# Altium PCB MOTORDEMO.PcbDoc
Units mm, origin at the board's own origin, x right, y up, seen from the top; angles counter-clockwise.
Board outline 56.64 x 37.09 mm, 2 copper layers (Top Layer, Bottom Layer); 56 components, 55 nets, 192 pads, 49 vias.
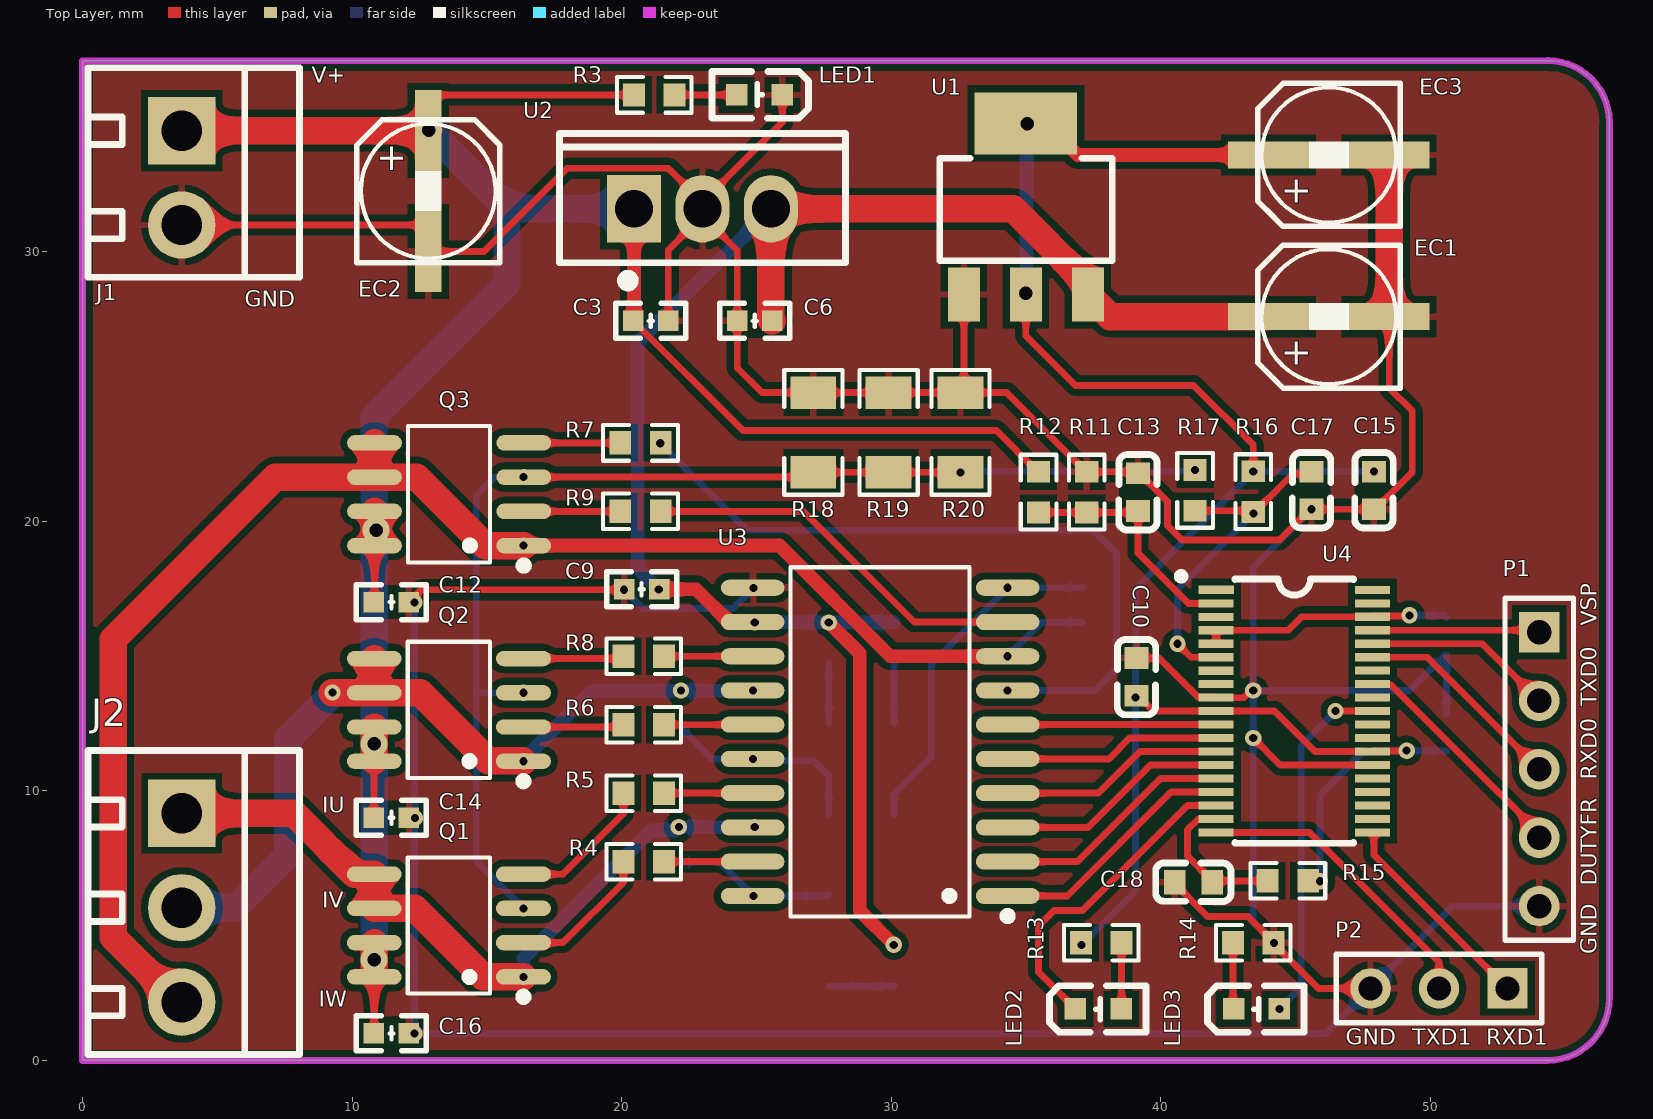
[diagram p0: Top Layer view]
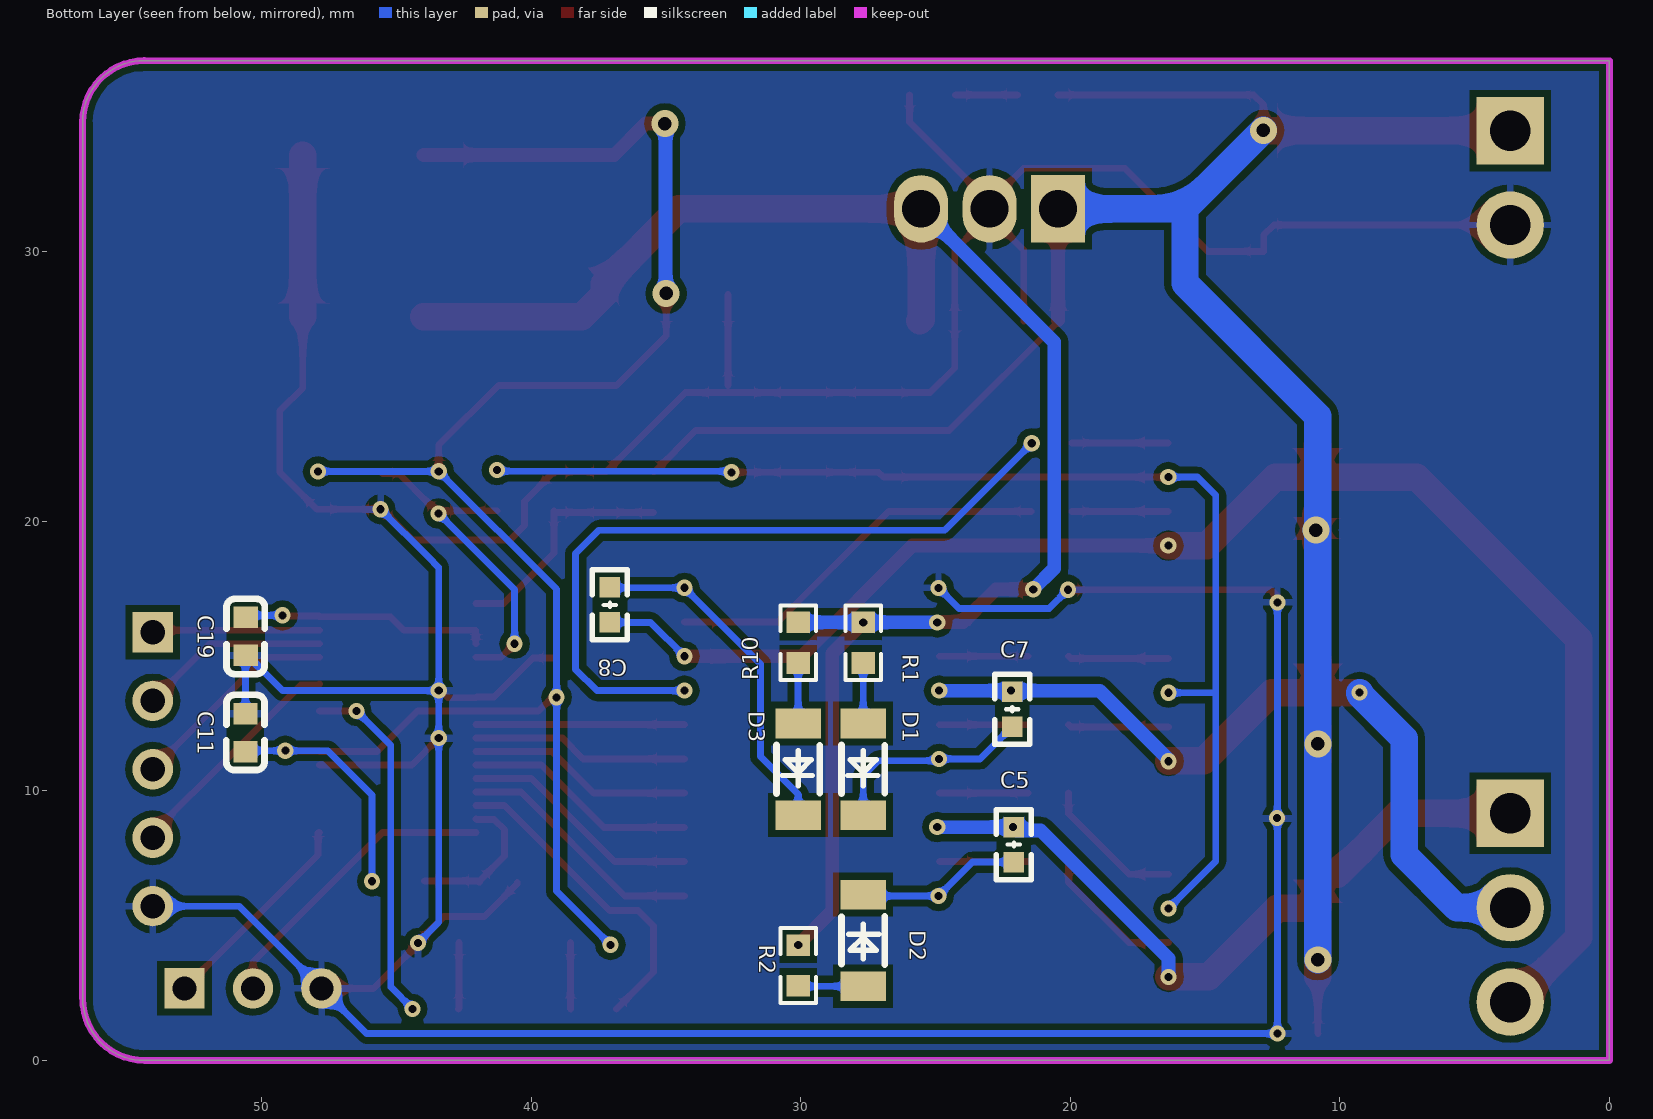
[diagram p1: Bottom Layer view, seen from below]

## Layer stack, top to bottom
Top Solder: solder mask 0.0102, Solder Resist, Dk 3.5
Top Layer: signal copper 0.0356
Dielectric 1: dielectric 0.32, FR-4, Dk 4.8
Bottom Layer: signal copper 0.0356
Bottom Solder: solder mask 0.0102, Solder Resist, Dk 3.5

## Board outline
0.004,-0.004 54.352,-0.004 ccw(c54.352,2.286) 56.642,2.286 56.646,2.29 56.646,34.798 ccw(c54.356,34.798) 54.356,37.088 54.349,37.08 0.004,37.08

## Design rules (kind name [scope] priority, off if disabled: settings)
Clearance [All] p1: gap=0.127 ignorepadtopadclearanceinfootprint=TRUE except(0.254: Arc-Fill Arc-Poly Arc-Region Track-Fill Track-Poly Track-Region SMDPad-Fill SMDPad-Poly SMDPad-Region THPad-Fill THPad-Poly THPad-Region Via-Fill Via-Poly Via-Region Fill-Fill Fill-Poly Fill-Region Poly-Poly Poly-Region Region-Region)
DiffPairsRouting [All] p1: maxlimit=0.254 minlimit=0.089 mostfreqgap=0.254 toplayer_minwidth=0.381 toplayer_maxwidth=0.381 toplayer_prefwidth=0.381 bottomlayer_minwidth=0.381 bottomlayer_maxwidth=0.381 bottomlayer_prefwidth=0.381 maxuncoupledlength=12.7
PolygonConnect [All] p1: connectstyle=Relief reliefconductorwidth=0.254 reliefentries=4 polygonreliefangle="90 Angle" airgapwidth=0.254
RoutingVias [All] p1: holewidth=0.711 width=1.27 viastyle="Through Hole" minholewidth=0.3 minwidth=0.5 maxholewidth=6.3 maxwidth=1.27
SilkToSilkClearance [All] p1: silktosilkclearance=0
SilkToSolderMaskClearance [IsPad] p1: minsilkscreentomaskgap=0 clearancetoexposedcopper=TRUE
SolderMaskExpansion [All] p1: expansion=0.102 istentingtop=FALSE
Width [All] p1: maxlimit=2.54 minlimit=0.089 preferedwidth=0.254
27 further rules are at their usual default settings.

## Components (designator, comment, footprint, x,y, rotation, side; value= is the part's Value field where it differs from the comment)
C3 "330nF" "C 0603_L" 21.082,27.432 r0 top
C5 "0.1uF" "C 0603_L" 22.098,8.001 r270 bottom
C6 "100nF" "C 0603_L" 24.94,27.432 r180 top
C7 "0.1uF" "C 0603_L" 22.158,13.024 r270 bottom
C8 "0.1uF" "C 0603_L" 37.084,16.897 r270 bottom
C9 "1uF" "C 0603_L" 20.743,17.474 r0 top
C10 "1uF" C0603 39.105,14.224 r90 top
C11 "1uF" C0603 50.606,12.154 r270 bottom
C12 "330nF" "C 0603_L" 11.46,17 r180 top
C13 "10nF" C0603 39.158,21.079 r90 top
C14 "330nF" "C 0603_L" 11.46,9 r180 top
C15 "1uF" C0603 47.908,21.142 r270 top
C16 "330nF" "C 0603_L" 11.46,1 r180 top
C17 "220pF" C0603 45.592,21.142 r270 top
C18 "10nF" C0603 41.22,6.604 r0 top
C19 "10nF" C0603 50.596,15.73 r90 bottom
D1 "SS16-LTP" LL-34_L3.5-W1.5-RD 27.686,10.795 r90 bottom
D2 "SS16-LTP" LL-34_L3.5-W1.5-RD 27.686,4.445 r270 bottom
D3 "SS16-LTP" LL-34_L3.5-W1.5-RD 30.099,10.795 r90 bottom
EC1 "10uF" SMD-EC5.0X5.3X5.4 44,27.587 r0 top
EC2 "10uF" SMD-EC5.0X5.3X5.4 12.827,34.488 r270 top
EC3 "10uF" SMD-EC5.0X5.3X5.4 44,33.587 r0 top
J1 "KF350-2P" KF350-2P 3.683,34.488 r270 top
J2 "KF350-3P" KF350-3P 3.683,9.159 r270 top
LED1 "LED" LED0603-R-RD 25.115,35.814 r180 top
LED2 "LED" LED0603-R-RD 37.688,1.905 r0 top
LED3 "LED" LED0603-R-RD 43.552,1.905 r0 top
P1 "Header 5" HDR1X5 54.044,15.877 r270 top
P2 "Header 3" HDR1X3 52.865,2.667 r180 top
Q1 "NCE6005AS_C558201" NCE6005AS 13.589,5 r90 top
Q2 "NCE6005AS_C558201" NCE6005AS 13.589,13 r90 top
Q3 "NCE6005AS_C558201" NCE6005AS 13.6,21 r90 top
R1 "5.1" R0603 27.686,15.494 r90 bottom
R2 "5.1" R0603 30.099,3.517 r90 bottom
R3 "20K" R0603 21.209,35.814 r0 top
R4 "22" R0603 20.819,7.37 r0 top
R5 "22" R0603 20.819,9.91 r0 top
R6 "22" R0603 20.819,12.45 r0 top
R7 "22" R0603 20.701,22.905 r180 top
R8 "22" R0603 20.819,14.99 r0 top
R9 "22" R0603 20.701,20.365 r180 top
R10 "5.1" R0603 30.099,15.494 r270 bottom
R11 "30K" R0603 37.253,21.079 r270 top
R12 "100K" R0603 35.466,21.079 r90 top
R13 "22K" R0603 37.794,4.365 r180 top
R14 "22K" R0603 43.434,4.365 r180 top
R15 "2K" R0603 44.719,6.657 r180 top
R16 "10K" R0603 43.434,21.097 r270 top
R17 "2K" R0603 41.275,21.142 r90 top
R18 "1" R1206 27.112,23.292 r270 top
R19 "1" R1206 29.906,23.292 r270 top
R20 "1" R1206 32.573,23.292 r270 top
U1 "AMS1117-3.3_C498117" PG-SOT223-4_L6.5-W3.5-P2.30-LS7.0-BR 35,31.587 r270 top
U2 "7812" TO-220-3_L10.0-W4.5-P2.54-L 23,31.587 r0 top
U3 "FAN7888MX" FAN7888 29.591,11.815 r90 top locked
U4 "IMC101T-T038" IMC101T-T038 44.958,12.954 r270 top

## Footprints (in the part's own frame and the unit in brackets; to place one, negate y for a bottom-side part, rotate by r counter-clockwise, add the part's x,y. Pads: shape width x height; smd on the part's side, far side on the other; paste and mask are expansions set on the pad)
C0603 [mm] "C15725"
  rect 0.8x0.9 smd: 1(-0.7,0) 2(0.7,0)
  silkscreen extent -1.41,-0.71 1.39,0.72
"C 0603_L" [mil] "无极性贴片电容"
  rect 30x30 smd: 1(-25.59,0) 2(25.59,0)
  silkscreen extent -51,-26 51,26, body extent -31,-16 31,16, height 32
FAN7888 [mm] "SOIC-20_L13.0-W7.6-P1.27-LS10.3-BL"
  oval 0.595x2.36 smd: 1(-5.715,-4.73) 2(-4.445,-4.73) 3(-3.175,-4.73) 4(-1.905,-4.73) 5(-0.635,-4.73) 6(0.635,-4.73) 7(1.905,-4.73) 8(3.175,-4.73) 9(4.445,-4.73) 10(5.715,-4.73) 11(5.715,4.73) 12(4.445,4.73) 13(3.175,4.73) 14(1.905,4.73) 15(0.635,4.73) 16(-0.635,4.73) 17(-1.905,4.73) 18(-3.175,4.73) 19(-4.445,4.73) 20(-5.715,4.73)
  silkscreen extent -6.61,-4.88 6.48,3.32
HDR1X3 [mm] "Connector; Header; 3 Position"
  rect 1.5x1.5 hole 0.9: 1(0,0)
  round 1.5 hole 0.9: 2(2.54,0) 3(5.08,0)
  silkscreen extent -1.27,-1.27 6.35,1.27
HDR1X5 [mm] "Connector; Header; 5 Position"
  rect 1.5x1.5 hole 0.9: 1(0,0)
  round 1.5 hole 0.9: 2(2.54,0) 3(5.08,0) 4(7.62,0) 5(10.16,0)
  silkscreen extent -1.27,-1.27 11.43,1.27
IMC101T-T038 [mm] "TSSOP-38_L9.7-W4.4-P0.50-LS6.4-BL"
  rect 0.3x1.3 smd: 1(-4.501,-2.899) 2(-3.999,-2.901) 3(-3.498,-2.901) 4(-2.999,-2.901) 5(-2.499,-2.901) 6(-1.999,-2.901) 7(-1.499,-2.901) 8(-0.999,-2.901) 9(-0.499,-2.901) 10(0.001,-2.901) 11(0.501,-2.901) 12(1.001,-2.901) 13(1.501,-2.901) 14(2.001,-2.901) 15(2.501,-2.901) 16(3.001,-2.901) 17(3.501,-2.901) 18(4.001,-2.901) 19(4.501,-2.901) 20(4.5,2.899) 21(4.001,2.9) 22(3.501,2.899) 23(3.002,2.899) 24(2.499,2.901) 25(2,2.9) 26(1.5,2.9) 27(1,2.9) 28(0.5,2.9) 29(0,2.9) 30(-0.5,2.9) 31(-1,2.9) 32(-1.5,2.9) 33(-2,2.9) 34(-2.5,2.9) 35(-3,2.9) 36(-3.5,2.9) 37(-4,2.9) 38(-4.5,2.9)
  silkscreen extent -5.14,-4.34 4.9,2.2
KF350-2P [mm] "可拼接端子/10A"
  rect 2.5x2.5 hole 1.5: 1(0,0)
  round 2.5 hole 1.5: 2(3.5,0)
  silkscreen extent -2.34,-3.48 5.44,4.37, body extent -2.15,-3.34 5.25,4.16, height 10
KF350-3P [mm] "可拼接端子/10A"
  rect 2.5x2.5 hole 1.5: 1(0,0)
  round 2.5 hole 1.5: 2(3.5,0) 3(7,0)
  silkscreen extent -2.34,-3.48 8.94,4.37, body extent -2.15,-3.34 8.75,4.16, height 10
LED0603-R-RD [mm] "C181863"
  rect 0.8x0.8 smd: 1(0.851,0) 2(-0.851,0)
  silkscreen extent -1.82,-0.86 1.77,0.86
LL-34_L3.5-W1.5-RD [mm] "二极管玻璃"
  rect 1.1x1.7 smd: 1(-1.7,0) 2(1.7,0)
  silkscreen extent -0.9,-0.8 0.9,0.8
NCE6005AS [mm] "SOP-8_L5.0-W4.0-P1.27-LS6.0-BL"
  oval 0.574x2.036 smd: 1(-1.905,-2.768) 2(-0.635,-2.768) 3(0.635,-2.768) 4(1.905,-2.768) 5(1.905,2.768) 6(0.635,2.768) 7(-0.635,2.768) 8(-1.905,2.768)
  silkscreen extent -2.79,-2.92 2.53,1.52
PG-SOT223-4_L6.5-W3.5-P2.30-LS7.0-BR [mm]
  rect 2x1.2 smd: 1(3.175,-2.3) 2(3.175,0) 3(3.175,2.3)
  rect 2.3x3.8 smd: 4(-3.175,0)
  silkscreen extent -1.87,-3.2 1.93,3.2
R0603 [mm] "C327832"
  rect 0.806x0.864 smd: 1(-0.753,0) 2(0.753,0)
  silkscreen extent -1.39,-0.66 1.39,0.66
R1206 [mm]
  rect 1.208x1.701 smd: 1(-1.479,0) 2(1.479,0)
  silkscreen extent -2.31,-1.08 2.31,1.08
SMD-EC5.0X5.3X5.4 [mm]
  rect 3x1 smd: 1(0,0) 2(4.477,0)
  silkscreen extent -0.41,-2.65 4.89,2.66, body extent -0.79,-2.65 5.11,2.65, height 5.41
TO-220-3_L10.0-W4.5-P2.54-L [mm]
  rect 2x2.5 hole 1.4: 1(-2.54,0)
  oval 2x2.5 hole 1.4: 2(0,0) 3(2.54,0)
  silkscreen extent -5.3,-2.86 5.3,2.8

## Part data
C3 C5 C6 C7 C8 C9 C12 C14 C16: library part CAP, "Capacitor"
C10 C11 C13 C15 C17 C18 C19: library part 100nF, BOM_JLCPCB Part Class="Extended Part", BOM_Manufacturer=SAMSUNG, BOM_Manufacturer Part=CL10B104KC8NNNC, BOM_Supplier=LCSC, BOM_Supplier Part=C15725, nameAlias=Capacitance, spicePre=C, spiceSymbolName=CL10B104KC8NNNC
D1 D2 D3: BOM_JLCPCB Part Class="Extended Part", BOM_Manufacturer=MCC, BOM_Manufacturer Part=SS16-LTP, BOM_Supplier=LCSC, BOM_Supplier Part=C85689, spicePre=D, spiceSymbolName=SS16-LTP
EC1 EC2 EC3: library part SMD_ECAP, "贴片电解电容"
LED1 LED2 LED3: BOM_JLCPCB Part Class="Extended Part", BOM_Manufacturer="Everlight Elec", BOM_Manufacturer Part=19-213/R6W-BP2Q2B/3T, BOM_Supplier=LCSC, BOM_Supplier Part=C181863, Contributor=LCSC, spicePre=L, spiceSymbolName=19-213/R6W-BP2Q2B/3T
P1: "Header, 5-Pin", LatestRevisionDate=17-Jul-2002, LatestRevisionNote="Re-released for DXP Platform.", Publisher="Altium Limited"
P2: "Header, 3-Pin", LatestRevisionDate=17-Jul-2002, LatestRevisionNote="Re-released for DXP Platform.", Publisher="Altium Limited"
Q1 Q2 Q3: BOM_JLCPCB Part Class="Extended Part", BOM_Manufacturer="VBsemi Elec", BOM_Manufacturer Part=NCE6005AS, BOM_Supplier=LCSC, BOM_Supplier Part=C558201, Contributor=LCSC, spicePre=Q, spiceSymbolName=NCE6005AS_C558201
R1 R2 R3 R4 R5 R6 R7 R8 R9 R10 R11 R12 R13 R14 R15 R16 R17 R18 R19 R20: library part 1M, BOM_Manufacturer="Huaxin S&T", BOM_Manufacturer Part=MR06X105JTL, BOM_Supplier=LCSC, BOM_Supplier Part=C327832, Contributor=LCSC, nameAlias="Resistance (Ohms)", spicePre=R, spiceSymbolName=MR06X105JTL
U1: BOM_Manufacturer="HGC(Huaguan Semicon)", BOM_Manufacturer Part=AMS1117-3.3, BOM_Supplier=LCSC, BOM_Supplier Part=C498117, Contributor=LCSC, spicePre=U, spiceSymbolName=AMS1117-3.3_C498117
U2: BOM_JLCPCB Part Class="Extended Part", BOM_Manufacturer="Foshan Blue Rocket Elec", BOM_Manufacturer Part=7812, BOM_Supplier=LCSC, BOM_Supplier Part=C358369, Contributor=LCSC, spicePre=U, spiceSymbolName=7812
U3: BOM_JLCPCB Part Class="Extended Part", BOM_Manufacturer="ON Semicon", BOM_Manufacturer Part=FAN7888MX, BOM_Supplier=LCSC, BOM_Supplier Part=C258167, Contributor=LCSC, spicePre=U, spiceSymbolName=FAN7888MX
U4: BOM_JLCPCB Part Class="Extended Part", BOM_Manufacturer="Infineon Technologies", BOM_Manufacturer Part=IMC101T-T038, BOM_Supplier=LCSC, BOM_Supplier Part=C536267, Contributor=LCSC, spicePre=U, spiceSymbolName=IMC101T-T038

## Via types
v1: diameter 0.6, hole 0.3, Top Layer to Bottom Layer, tented both sides, 40 vias
v2: diameter 1, hole 0.5, Top Layer to Bottom Layer, tented both sides, 6 vias
v3: diameter 0.6, hole 0.3, Top Layer to Bottom Layer, 3 vias

## Nets (pads, with @x,y where several pads share a name; then routed paths per layer and width w, separated by ;. In a path a pad name is that pad's centre, name@x,y a point inside that pad or via, vN(x,y) a via of type N, cw(c..) or ccw(c..) an arc to the next point about the centre after c; other vN are vias at no path point)
+3.3V: C10.1 C11.2 C15.1 EC3.1 R13.2 R15.1 R16.1 U1.2 U1.4 U4.10 U4.26 | length 72.7
  Top Layer w0.254: v2(34.995,28.454) 34.995,28.417 U1.2 34.995,28.407 34.995,26.877 36.837,25.035 41.22,25.035 43.434,22.82 v1(43.434,21.85) ; R13.2 37.067,4.338 v1(37.067,4.284) ; C10.1 39.155,13.524 39.726,12.953 U4.10 44.219,12.953 45.718,11.454 U4.26 47.874,11.47 49.109,11.47 v1(49.125,11.486)
  Top Layer w0.508: v2(35.042,34.752) 35.76,34.752 36.925,33.587 EC3.1
  Bottom Layer w0.254: v1(37.067,4.284) 39.06,6.277 v1(39.06,13.467) 39.06,17.476 v1(43.434,21.85) 43.438,21.846 47.904,21.846 v1(47.908,21.842) ; v1(45.914,6.641) 45.914,9.846 47.554,11.486 v1(49.125,11.486) 50.575,11.486 C11.2
  Bottom Layer w0.508: v2(34.995,28.454) 35.018,28.477 35.018,34.728 v2(35.042,34.752)
+12V: C6.1 C9.2 EC1.1 R1.2 R2.2 R10.1 U1.3 U2.3 U3.12 | length 63.1
  Top Layer w0.508: C9.2 22.765,17.474 23.979,16.26 U3.12 ; v1(27.686,16.247) 28.829,15.104 28.829,5.553 v1(30.097,4.284)
  Top Layer w1.016: C6.1 25.54,27.482 U2.3 34.525,31.587 37.3,28.812 U1.3 38.125,27.587 EC1.1
  Bottom Layer w0.508: v3(21.378,17.473) 20.603,18.249 20.603,26.65 U2.3 ; v1(24.94,16.247) v1(27.686,16.247) R10.1
DIR: U4.28
DUTYFR: P1.4 U4.31 | length 8.6
  Top Layer w0.254: U4.31 47.881,13.931 48.54,13.931 51.125,11.346 54.044,8.427 P1.4
GK: C18.2 R15.2 U4.18 | length 5.6
  Top Layer w0.254: U4.18 42.034,8.93 41.375,8.93 40.999,8.554 40.999,7.574 41.92,6.654 C18.2 41.972,6.657 R15.2
GND: C3.2 C6.2 C9.1 C10.2 C11.1 C12.1 C13.2 C14.1 C15.2 C16.1 C17.2 C18.1 C19.1 EC1.2 EC2.2 EC3.2 J1.2 LED1.2 P1.5 P2.3 R11.1 R14.1 R18.1 R19.1 R20.1 U1.1 U2.2 U3.11 U4.9 U4.25 | length 202.7
  Top Layer w0.254: J1.2 12.454,30.988 12.827,30.615 EC2.2 14.898,30.011 17.978,33.091 21.746,33.091 U2.2@23,31.837 ; C16.1 12.311,1 v1(12.319,0.992) ; C14.1 12.316,9 v1(12.331,8.985) ; v1(12.315,16.988) 12.315,17.205 12.566,17.456 v3(20.093,17.456) C9.1 ; C3.2 21.732,30.069 U2.2@23,31.337 ; U3.11 24.888,17.53 v3(24.892,17.526) ; LED1.2 25.966,34.803 U2.2@23,31.837 ; R20.1@32.7,25.035 U1.1 ; C10.2 39.936,14.924 40.619,14.241 40.619,14.232 41.375,13.476 42.034,13.476 U4.9 43.088,13.453 43.349,13.714 v1(43.434,13.714) ; C18.1 40.52,6.554 41.74,5.334 43.247,5.334 44.2,4.381 v1(44.2,4.353) ; v1(43.434,11.953) 44.433,10.954 U4.25 ; R14.1 44.187,4.336 45.856,2.667 P2.3 ; EC1.2 48.477,24.945 49.334,24.087 49.334,21.818 47.958,20.442 C15.2 v1(45.592,20.442) 45.542,20.442 44.404,19.304 40.79,19.304 40.249,19.844 40.249,20.738 39.208,21.779 C13.2 39.105,21.832 R11.1 37.224,21.832 34.286,24.771 R20.1 R19.1 R18.1 25.203,24.771 24.29,25.685 C6.2 24.29,30.047 U2.2@23,31.337 ; U2.2@23,31.337 U2.2 U2.2@23,31.837
  Top Layer w1.016: EC1.2 EC3.2
  Bottom Layer w0.254: v1(12.315,16.988) 12.323,16.98 12.323,8.993 v1(12.331,8.985) 12.319,8.973 v1(12.319,0.992) 46.11,0.992 P2.3 50.835,5.717 P1.5 ; v3(20.093,17.456) 20.786,16.764 24.13,16.764 v3(24.892,17.526) ; v1(44.2,4.353) 43.434,5.119 v1(43.434,11.953) v1(43.434,13.714) ; v1(45.592,20.442) 43.819,18.669 43.815,18.669 43.434,18.288 v1(43.434,13.714) ; C11.1 50.606,15.019 C19.1 50.546,15.03 49.23,13.714 v1(43.434,13.714)
GPIO8: U4.30
GPIO9: U4.32
HO1: Q1.2 R4.1 | length 5.4
  Top Layer w0.254: Q1.2 17.827,4.365 20.066,6.604 R4.1
HO2: Q2.2 R6.1 | length 3.7
  Top Layer w0.254: Q2.2 19.981,12.365 R6.1
HO3: Q3.2 R9.2 | length 3.6
  Top Layer w0.254: Q3.2 R9.2
IU: C5.1 J2.1 Q1.1 Q1.5 Q1.6 U3.18 | length 27.2
  Top Layer w1.016: J2.1 7.836,9.159 10.09,6.905 Q1.5 Q1.6 12.319,5.635 14.859,3.095 v1(16.357,3.095)
  Bottom Layer w0.508: v1(16.357,3.095) 16.357,3.784 21.097,8.524 21.994,8.524 v1(22.123,8.653) ; C5.1 22.1,8.653 v1(22.123,8.653) ; v1(24.94,8.651) 22.125,8.651 v1(22.123,8.653)
IU+: C17.1 R16.2 R17.1 U4.6 | length 12.6
  Top Layer w0.254: v1(40.619,15.453) 41.119,14.953 U4.6 ; R17.1 43.389,20.389 R16.2 43.71,20.62 43.77,20.62 44.91,21.76 45.511,21.76 C17.1
  Bottom Layer w0.254: v1(40.619,15.453) 40.619,17.47 v1(43.436,20.288)
IV: C7.1 J2.2 Q2.1 Q2.5 Q2.6 U3.14 | length 30.5
  Top Layer w1.016: v1(9.271,13.64) 9.276,13.635 Q2.6 ; Q2.5 Q2.6 ; v1(16.357,11.095) 16.335,11.117 15.045,11.117 12.527,13.635 Q2.6
  Bottom Layer w0.508: v1(16.357,11.095) 16.357,11.155 18.915,13.714 v1(22.198,13.714) v1(24.868,13.714)
  Bottom Layer w1.016: J2.2 5.659,5.659 7.62,7.62 7.62,11.938 9.225,13.543 9.225,13.569 9.271,13.615 v1(9.271,13.64)
IW: C8.2 J2.3 Q3.1 Q3.5 Q3.6 U3.8 | length 57.6
  Top Layer w0.508: v1(16.368,19.095) 25.863,19.095 29.968,14.99 v1(34.321,14.99)
  Top Layer w1.016: J2.3 3.556,2.159 1.143,4.572 1.143,15.621 7.157,21.635 Q3.6 ; Q3.5 Q3.6 ; v1(16.368,19.095) 14.941,19.095 12.401,21.635 Q3.6
  Bottom Layer w0.254: v1(34.321,14.99) 35.578,16.247 C8.2
LO1: Q1.4 R5.1 | length 5.4
  Top Layer w0.254: Q1.4 17.823,6.905 20.066,9.148 R5.1
LO2: Q2.4 R8.1 | length 3.7
  Top Layer w0.254: Q2.4 19.98,14.905 R8.1
LO3: Q3.4 R7.2 | length 3.6
  Top Layer w0.254: Q3.4 R7.2
NetC5_2: C5.2 D2.1 U3.20 | length 6.1
  Bottom Layer w0.254: C5.2 23.637,7.351 v1(24.892,6.096) 27.637,6.096 D2.1
NetC7_2: C7.2 D1.1 U3.16 | length 7.7
  Bottom Layer w0.254: C7.2 23.351,11.181 v1(24.874,11.181) 24.94,11.115 27.112,11.115 27.686,10.541 D1.1
NetC8_1: C8.1 D3.1 U3.10 | length 13
  Bottom Layer w0.254: D3.1 30.099,9.877 31.496,11.274 31.496,14.705 v1(34.321,17.53) 37.067,17.53 C8.1
NetC13_1: C13.1 R11.2 R12.1 U4.2 | length 8.9
  Top Layer w0.254: R12.1 R11.2 39.105,20.326 C13.1 39.158,18.817 41.022,16.953 U4.2
NetD1_2: D1.2 R1.1 | length 2.2
  Bottom Layer w0.254: D1.2 R1.1
NetD2_2: D2.2 R2.1 | length 2.4
  Bottom Layer w0.254: D2.2 30.08,2.745 R2.1
NetD3_2: D3.2 R10.2 | length 2.2
  Bottom Layer w0.254: D3.2 R10.2
NetLED1_1: LED1.1 R3.2 | length 2.3
  Top Layer w0.254: R3.2 LED1.1
NetLED2_1: LED2.1 R13.1 | length 2.5
  Top Layer w0.254: LED2.1 38.547,1.913 R13.1
NetLED2_2: LED2.2 U4.17 | length 12.1
  Top Layer w0.254: LED2.2 35.466,3.276 35.466,4.986 36.033,5.553 37.1,5.553 40.999,9.453 U4.17
NetLED3_1: LED3.1 U4.29 | length 13.3
  Top Layer w0.254: v1(46.482,12.953) U4.29@47.857,12.953
  Bottom Layer w0.254: v1(44.403,1.905) 45.212,2.714 45.212,11.683 v1(46.482,12.953)
NetLED3_2: LED3.2 R14.2 | length 2.5
  Top Layer w0.254: R14.2 42.681,1.926 LED3.2
NetR4_2: R4.2 U3.19 | length 3.3
  Top Layer w0.254: R4.2 U3.19
NetR5_2: R5.2 U3.17 | length 3.3
  Top Layer w0.254: R5.2 U3.17
NetR6_2: R6.2 U3.15 | length 3.3
  Top Layer w0.254: R6.2 U3.15
NetR7_1: R7.1 U3.7 | length 27.3
  Bottom Layer w0.254: v1(21.433,22.892) 24.659,19.666 37.484,19.666 38.354,18.796 38.354,14.5 37.568,13.714 v1(34.321,13.714)
NetR8_2: R8.2 U3.13 | length 3.3
  Top Layer w0.254: R8.2 U3.13
NetR9_1: R9.1 U3.9 | length 14.6
  Top Layer w0.254: R9.1 26.752,20.365 30.857,16.26 U3.9
PAR0: U4.22
PAR1: U4.23
PAR2: U4.24
PAR3: U4.27
PGOUT: U4.21
PWMUH: U3.5 U4.12 | length 8.1
  Top Layer w0.254: U3.5 38.073,11.18 38.845,11.953 U4.12
PWMUL: U3.6 U4.11 | length 7.7
  Top Layer w0.254: U3.6 34.322,12.452 42.056,12.452 U4.11
PWMVH: U3.3 U4.14 | length 8.7
  Top Layer w0.254: U3.3 37.303,8.64 39.615,10.953 U4.14
PWMVL: U3.4 U4.13 | length 8.4
  Top Layer w0.254: U3.4 37.688,9.91 39.23,11.453 U4.13
PWMWH: U3.1 U4.16 | length 9.3
  Top Layer w0.254: U3.1 36.533,6.1 40.385,9.953 U4.16
PWMWL: U3.2 U4.15 | length 9
  Top Layer w0.254: U3.2 36.918,7.37 40,10.453 U4.15
REFU: C19.2 U4.4 U4.5 U4.36 | length 9.3
  Top Layer w0.254: U4.5 U4.4 44.719,15.953 45.22,16.454 U4.36 47.881,16.477 49.2,16.477 v1(49.231,16.508)
  Bottom Layer w0.254: v1(49.231,16.508) 50.518,16.508 C19.2
RXD0: P1.3 U4.33 | length 7.9
  Top Layer w0.254: U4.33 49.887,14.954 P1.3
RXD1: P2.1 U4.20 | length 7.9
  Top Layer w0.254: U4.20 47.885,8.454 47.908,8.431 47.908,7.623 P2.1
Shunt: Q1.3 Q2.3 Q3.3 R17.2 R18.2 R19.2 R20.2 | length 44.9
  Top Layer w0.254: v1(16.368,21.635) 26.933,21.635 R18.2 R19.2 v1(32.573,21.814)
  Bottom Layer w0.254: v1(16.357,5.635) 14.605,7.387 14.605,13.543 ; v1(16.357,13.635) 14.697,13.635 14.605,13.543 ; v1(16.368,21.635) 15.285,21.635 14.605,20.955 14.605,13.543 ; v1(32.573,21.814) 32.614,21.855 41.234,21.855 v1(41.275,21.895)
TXD0: P1.2 U4.34 | length 7.1
  Top Layer w0.254: U4.34 51.927,15.454 P1.2
TXD1: P2.2 U4.19 | length 11.2
  Top Layer w0.254: U4.19 45.522,8.453 50.325,3.65 P2.2
V+: C3.1 C12.2 C14.2 C16.2 EC2.1 J1.1 Q1.7 Q1.8 Q2.7 Q2.8 Q3.7 Q3.8 R3.1 R12.2 U2.1 | length 88.3
  Top Layer w0.254: C16.2 10.821,1.011 Q1.8 ; C14.2 10.81,11.084 Q2.8 ; C12.2 10.832,17.022 Q3.8 ; v2(12.838,34.499) 12.838,35.452 13.2,35.814 R3.1 ; C3.1@20.46,27.46 C3.1 24.496,23.368 33.902,23.368 35.437,21.832 R12.2
  Top Layer w0.508: C3.1@20.46,27.46 U2.1
  Top Layer w1.016: J1.1 EC2.1 v2(12.838,34.499) ; Q1.8 v2(10.821,3.73) Q1.7 ; Q2.8@10.821,11.106 v2(10.821,11.736) Q2.7 ; Q3.8 10.89,19.153 10.89,20.307 Q3.7
  Bottom Layer w1.016: v2(10.821,3.73) 10.821,19.603 v2(10.89,19.672) 10.82,19.742 10.82,23.901 15.748,28.829 15.748,31.584 15.751,31.587 ; v2(12.838,34.499) 15.751,31.587 ; U2.1 15.751,31.587
VSP: P1.1 U4.35 | length 6.2
  Top Layer w0.254: U4.35 53.967,15.954 P1.1
pads on no net: U4.1 U4.3 U4.7 U4.8 U4.37 U4.38

## Polygon pours and split planes (outlines as drawn)
GND on Bottom Layer "GND_L02_P034" (solid, pour order 34): 0.004,-0.004 54.352,-0.004 ccw(c54.352,2.286) 56.642,2.286 56.646,2.29 56.646,34.798 ccw(c54.356,34.798) 54.356,37.088 54.349,37.08 0.004,37.08
GND on Top Layer "GND_L01_P033" (solid, pour order 33): 0.004,-0.004 54.352,-0.004 ccw(c54.352,2.286) 56.642,2.286 56.646,2.29 56.646,34.798 ccw(c54.356,34.798) 54.356,37.088 54.349,37.08 0.004,37.08

## Keep-outs
Keep-Out Layer:
  lines w0.25: 54.352,-0.004 ccw(c54.352,2.286) 56.642,2.286 ; 54.356,37.088 cw(c54.356,34.798) 56.646,34.798
  lines w0.254: 54.349,37.08 0.004,37.08 0.004,-0.004 54.352,-0.004 ; 56.646,2.29 56.646,34.798

## Silkscreen, mask and mechanical layers (free items; w line width, h text height)
Top Overlay:
  text "V+" at 8.509,36.068 h1.02
  text "GND" at 6.02,27.757 h1.02
  text "VSP" at 56.388,16.129 h1.02 r90
  text "TXD0" at 56.388,13.128 h1.02 r90
  text "RXD0" at 56.388,10.414 h1.02 r90
  text "IU" at 8.89,8.973 h1.02
  text "DUTYFR" at 56.388,6.477 h1.02 r90
  text "IV" at 8.89,5.461 h1.02
  text "GND" at 56.388,3.937 h1.02 r90
  text "IW" at 8.763,1.778 h1.02
  text "GND" at 46.863,0.381 h1.02
  text "TXD1" at 49.334,0.381 h1.02
  text "RXD1" at 52.07,0.381 h1.02

## Text inside footprints (layer, text, board x,y; h text height)
EC1: Top Overlay "+" at 44.445,25.81 h1.02
EC2: Top Overlay "+" at 11.05,34.043 h1.02 r270
EC3: Top Overlay "+" at 44.445,31.81 h1.02